# EAGLE board shema2 (EAGLE 7.6.0)
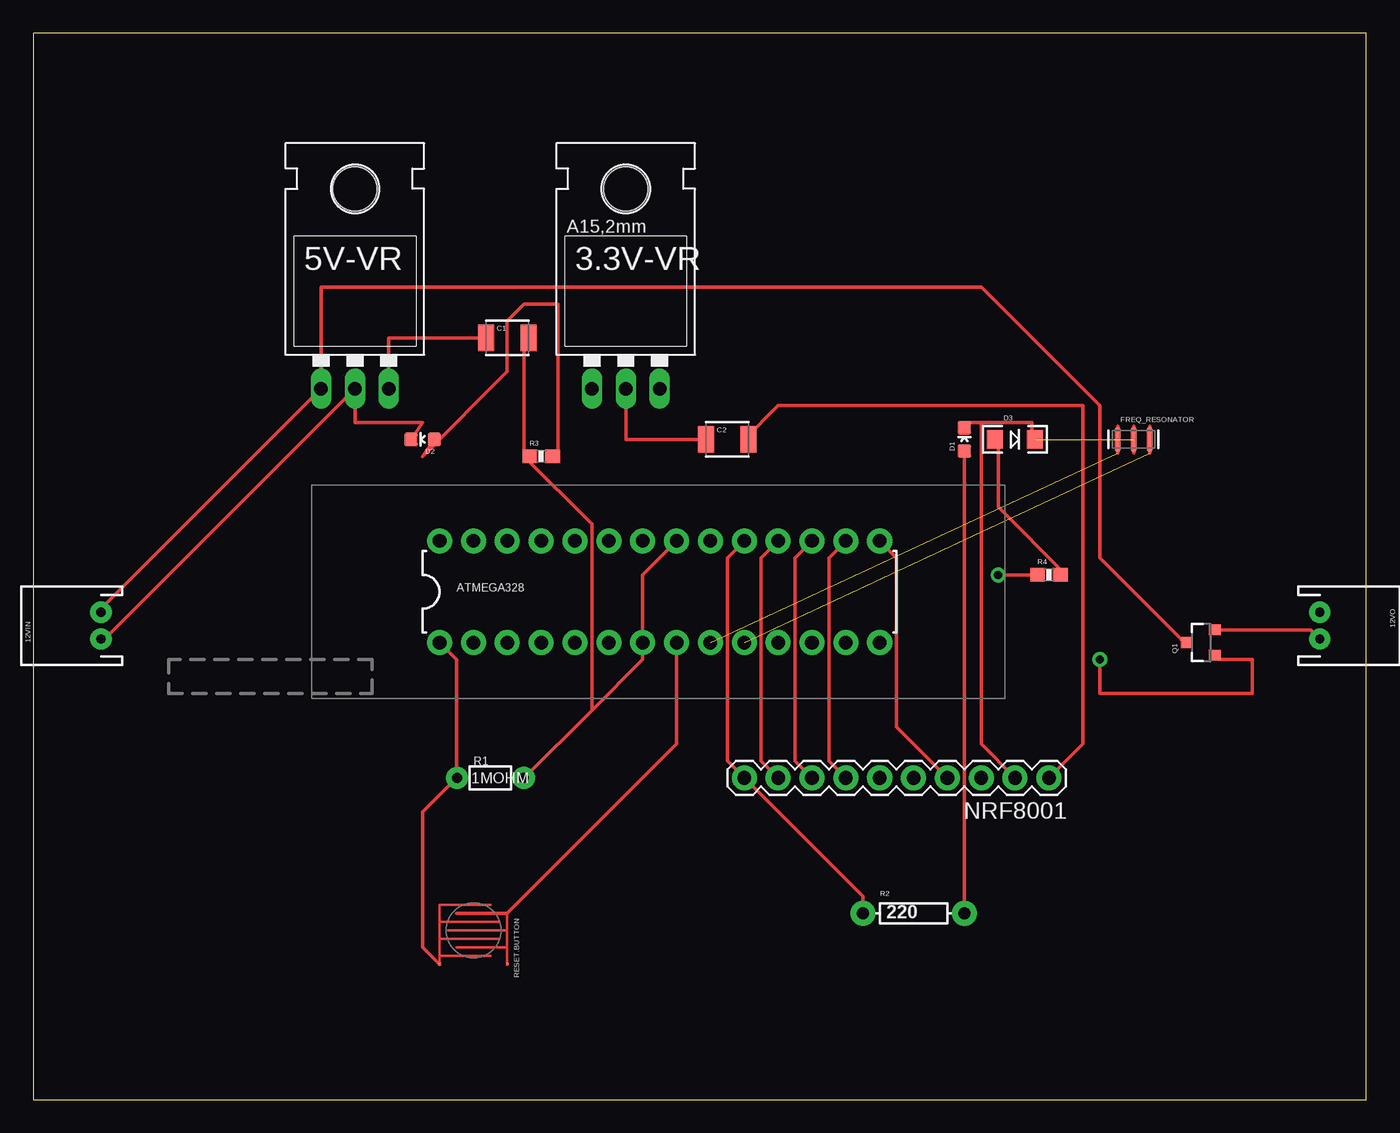
[diagram p0: board, top side]
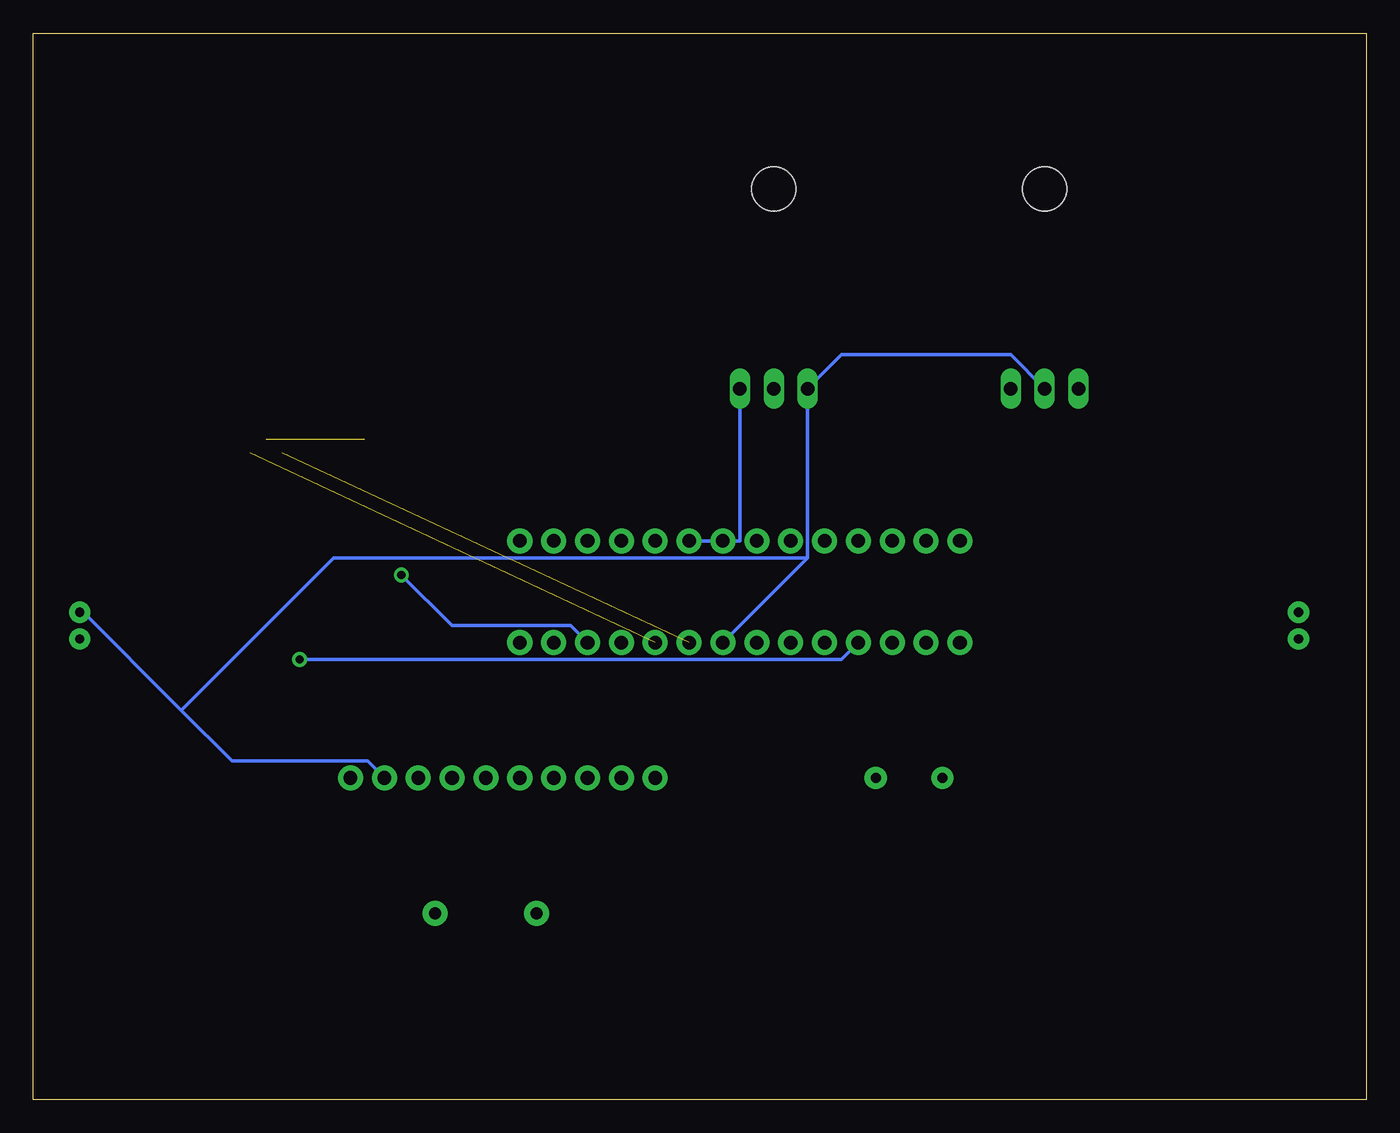
[diagram p1: board, bottom side, seen from below]

Size 100 x 80 mm. Coordinates in mm from the lower left corner, seen from the top.
Outline: 0,0 100,0 100,80 0,80 0,0
Copper layers (1*16): Top 0.035mm / dielectric 1.5mm / Bottom 0.035mm
Design rules "SparkFun-2-layer-STANDARD": minimum track width 10mil, minimum drill 20mil, track to track 10mil, track to pad 8mil, pad to pad 8mil, via to via 10mil, smd to smd 8mil, copper to edge 8mil, drill to drill 8mil, minimum pad ring 10mil, minimum via ring 10mil, stop-mask expansion 4mil, vias tented up to drill 25mil, thermal gap 10mil

## Footprints (pad centres in the part's own frame; a part is rotated, then mirrored left to right if it is on the bottom)
78XXL = drill 1.016 long: GND 0,-3.81; IN -2.54,-3.81; OUT 2.54,-3.81 | hole 3.302: 0,11.176
TO-220-ALT = drill 1.016 long: GND 0,-3.81; IN -2.54,-3.81; OUT 2.54,-3.81 | hole 3.302: 0,11.176
JST-2-PTH = drill 0.7 pad 1.6: 1 -1,0; 2 1,0
DIL28-3-ZIF_SOCKET = drill 1.016 pad 1.88: 1 -16.51,-3.81; 2 -13.97,-3.81; 3 -11.43,-3.81; 4 -8.89,-3.81; 5 -6.35,-3.81; 6 -3.81,-3.81; 7 -1.27,-3.81; 8 1.27,-3.81; 9 3.81,-3.81; 10 6.35,-3.81; 11 8.89,-3.81; 12 11.43,-3.81; 13 13.97,-3.81; 14 16.51,-3.81; 15 16.51,3.81; 16 13.97,3.81; 17 11.43,3.81; 18 8.89,3.81; 19 6.35,3.81; 20 3.81,3.81; 21 1.27,3.81; 22 -1.27,3.81; 23 -3.81,3.81; 24 -6.35,3.81; 25 -8.89,3.81; 26 -11.43,3.81; 27 -13.97,3.81; 28 -16.51,3.81
1210 = smd 1.2 x 2: 1 -1.6,0; 2 1.6,0
LED-0603 = smd 1 x 1: A 0,-0.877; C 0,0.877
LED-1206 = smd 1.2 x 1.4: A -1.5,0; C 1.5,0
RESONATOR-SMD = smd 0.45 x 1.905: 1 -1.2,0; 2 0,0; 3 1.2,0
1X10 = drill 1.016 pad 1.88: 1 0,0; 2 2.54,0; 3 5.08,0; 4 7.62,0; 5 10.16,0; 6 12.7,0; 7 15.24,0; 8 17.78,0; 9 20.32,0; 10 22.86,0
SOT23-3 = smd 0.8 x 0.9: 1 -0.95,-1; 2 0.95,-1; 3 0,1.1
1/6W-RES = drill 0.762 pad 1.676: 1 -2.5,0; 2 2.5,0
AXIAL-0.3EZ = drill 0.9 pad 1.88: P$1 -3.81,0; P$2 3.81,0
0603-RES = smd 1.1 x 1: 1 -0.85,0; 2 0.85,0
BUTTON-CONDUCTIVE = smd 0.203 x 0.203: 1 2.54,2.54; 2 2.54,-2.54

## Placement (x,y rotation side)
3.3V-VR  V_REG_LD1117VXX  [78XXL]  44.45,57.15 0 top
5V-VR  5V  [TO-220-ALT]  24.13,57.15 0 top
12VIN  12V  [JST-2-PTH]  5.08,35.56 90 top
12VO  12V  [JST-2-PTH]  96.52,35.56 270 top
ATMEGA328  ZIFSOCKET-28-3ZIFFSOCKET-28-3  [DIL28-3-ZIF_SOCKET]  46.99,38.1 0 top
C1  22uF  [1210]  35.56,57.15 0 top
C2  22uF  [1210]  52.07,49.53 0 top
D1  Yellow  [LED-0603]  69.85,49.53 0 top
D2  RED  [LED-0603]  29.21,49.53 90 top
D3  GREEN  [LED-1206]  73.66,49.53 0 top
FREQ_RESONATOR  16MHZ  [RESONATOR-SMD]  82.55,49.53 0 top
NRF8001  3.3V  [1X10]  76.2,24.13 180 top
Q1  2.5A/30V  [SOT23-3]  87.63,34.29 90 top
R1  1MOHM  [1/6W-RES]  34.29,24.13 0 top
R2  220  [AXIAL-0.3EZ]  66.04,13.97 0 top
R3  200  [0603-RES]  38.1,48.26 0 top
R4  200  [0603-RES]  76.2,39.37 0 top
RESET.BUTTON  BUTTON-CONDUCTIVESMD  [BUTTON-CONDUCTIVE]  33.02,12.7 270 top

## Library data of the parts
3.3V-VR = SparkFun-PowerIC
5V-VR = SparkFun-PowerIC; PROD_ID: VREG-08450; SF_ID: COM-00107
12VIN 12VO = SparkFun-Connectors; PROD_ID: CONN-09863; SKU: PRT-09914
ATMEGA328 = SparkFun-Connectors
C1 C2 = SparkFun-Capacitors; PROD_ID: CAP-10381
D1 = SparkFun-LED; PROD_ID: DIO-09003
D2 = SparkFun-LED; PROD_ID: DIO-00819
D3 = SparkFun-LED; PROD_ID: DIO-00862
FREQ_RESONATOR = SparkFun-FreqCtrl; PROD_ID: XTAL-08900
NRF8001 = SparkFun-Connectors; PROD_ID: CONN-11563
Q1 = SparkFun-DiscreteSemi; PROD_ID: TRANS-11308
R1 = SparkFun-Resistors
R2 = SparkFun-Resistors; PROD_ID: RES-12181
R3 R4 = SparkFun-Resistors; PROD_ID: RES-08220
RESET.BUTTON = SparkFun-Electromechanical

## Nets
3.3VIN: C2.2 NRF8001.1
5VIN: 3.3V-VR.OUT ATMEGA328.7 ATMEGA328.20 ATMEGA328.21 C1.2 R1.2 R3.1
12VIN: 5V-VR.IN 12VIN.2 Q1.3
ARDUINO.D3: ATMEGA328.4 Q1.1
GND: 3.3V-VR.IN 5V-VR.GND 12VIN.1 12VO.1 ATMEGA328.8 D1.C D2.C D3.C FREQ_RESONATOR.2 NRF8001.2 RESET.BUTTON.1
MISO: ATMEGA328.18 NRF8001.9
MOSI: ATMEGA328.17 NRF8001.8
N$1: ATMEGA328.9 FREQ_RESONATOR.1
N$2: ATMEGA328.10 FREQ_RESONATOR.3
N$3: ATMEGA328.1 R1.1 RESET.BUTTON.2
N$4: 12VO.2 Q1.2
N$5: 5V-VR.OUT C1.1
N$6: 3.3V-VR.GND C2.1
N$7: D1.A R2.P$2
N$8: D2.A R3.2
N$9: ATMEGA328.22
N$10: D3.A R4.2
PD6: ATMEGA328.12 R4.1
RDY: NRF8001.6
REQ: ATMEGA328.16 NRF8001.7
RST: ATMEGA328.15 NRF8001.4
SCK: ATMEGA328.19 NRF8001.10 R2.P$1

## Tracks (layer width: path | path; a pad name or v marks a point on that pad's centre or on a via)
3.3VIN
  Top 0.254: NRF8001.1 78.74,26.67 78.74,52.07 55.88,52.07 53.34,49.53 C2.2
5VIN
  Top 0.254: 36.83,48.26 36.83,57.15 C1.2 | 41.91,29.21 45.72,33.02 ATMEGA328.7 45.72,39.37 ATMEGA328.21 | 41.91,29.21 36.83,24.13 R1.2 | 36.83,48.26 41.91,43.18 41.91,29.21 | 36.83,48.26 R3.1
  Bottom 0.254: 3.3V-VR.OUT 46.99,41.91 ATMEGA328.21 ATMEGA328.20
12VIN
  Top 0.254: Q1.3 86.36,34.29 80.01,40.64 80.01,52.07 71.12,60.96 21.59,60.96 5V-VR.IN 5.08,36.83 12VIN.2
ARDUINO.D3  (via drill 0.61)
  Top 0.254: v80.01,33.02 80.01,30.48 91.44,30.48 91.44,33.02 88.95,33.02 Q1.1
  Bottom 0.254: v80.01,33.02 39.37,33.02 ATMEGA328.4
GND  (1 unrouted)
  Top 0.254: 71.12,50.8 74.93,50.8 74.93,49.53 D3.C | 71.12,50.8 69.85,50.8 D1.C | 71.12,50.8 71.12,26.67 NRF8001.2 | ATMEGA328.8 48.26,26.67 35.56,13.97 31.75,13.97 | D2.C 29.21,50.8 24.13,50.8 5V-VR.GND 5.08,34.29 12VIN.1
  Bottom 0.254: 88.9,29.21 85.09,25.4 74.93,25.4 NRF8001.2 | 88.9,29.21 96.52,36.83 12VO.1 | 5V-VR.GND 26.67,55.88 39.37,55.88 3.3V-VR.IN 41.91,40.64 | 41.91,40.64 ATMEGA328.8 | 88.9,29.21 77.47,40.64 41.91,40.64
MISO
  Top 0.254: NRF8001.9 54.61,25.4 54.61,40.64 ATMEGA328.18
MOSI
  Top 0.254: NRF8001.8 57.15,25.4 57.15,40.64 ATMEGA328.17
N$1  (1 unrouted)
N$2  (1 unrouted)
N$3
  Top 0.254: RESET.BUTTON.2 29.21,11.43 29.21,21.59 31.75,24.13 | ATMEGA328.1 31.75,33.02 31.75,24.13 | 31.75,24.13 R1.1
N$4
  Top 0.254: Q1.2 95.84,35.24 12VO.2
N$5
  Top 0.254: 5V-VR.OUT 26.67,57.15 C1.1 34.29,57.15
N$6
  Top 0.254: 3.3V-VR.GND 44.45,49.53 C2.1 50.8,49.53
N$7
  Top 0.254: R2.P$2 D1.A
N$8
  Top 0.254: D2.A 29.21,48.26 35.56,54.61 35.56,58.42 36.83,59.69 39.37,59.69 39.37,48.26 R3.2
N$10
  Top 0.254: R4.2 77.47,39.37 72.39,44.45 72.39,49.53 D3.A
PD6  (via drill 0.61)
  Top 0.254: v72.39,39.37 R4.1
  Bottom 0.254: v72.39,39.37 68.58,35.56 59.69,35.56 ATMEGA328.12
REQ
  Top 0.254: NRF8001.7 59.69,25.4 59.69,40.64 ATMEGA328.16
RST
  Top 0.254: NRF8001.4 64.77,27.94 64.77,40.64 ATMEGA328.15
SCK
  Top 0.254: R2.P$1 62.23,15.24 NRF8001.10 52.07,25.4 52.07,40.64 ATMEGA328.19